# Altium PCB Motor_Driver_Model_D201.PcbDoc (part 1 of 2)
Units mil, origin at the board's own origin, x right, y up, seen from the top; angles counter-clockwise.
Board outline 1181.1 x 787.4 mil, 4 copper layers (1-SIG-TOP, 2-GND, 3-GND-PWR, 4-SIG-BOT), stack 37.795 mil thick; 50 components, 25 nets, 114 pads, 118 vias.
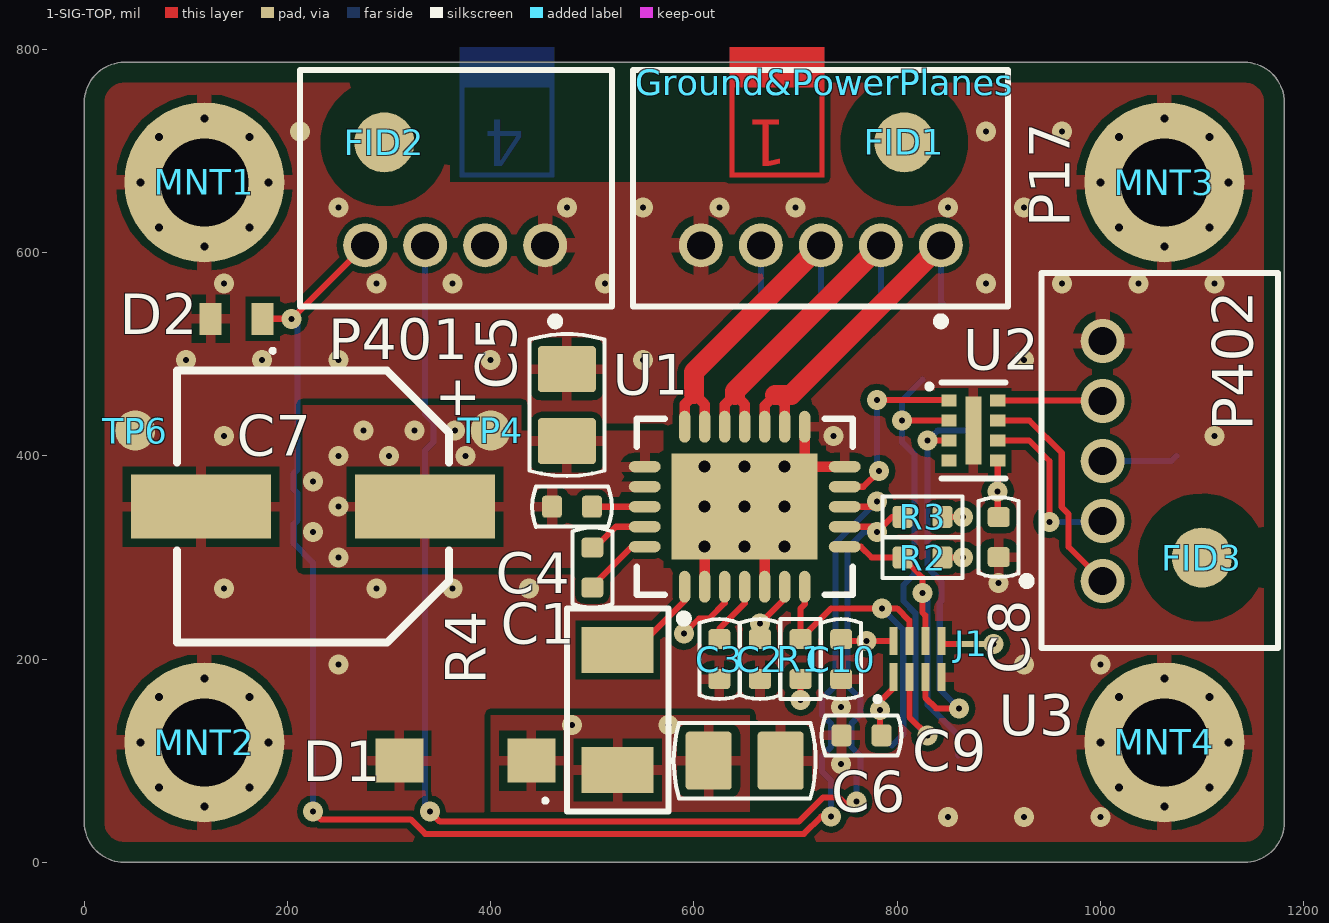
[diagram p0: 1-SIG-TOP view]
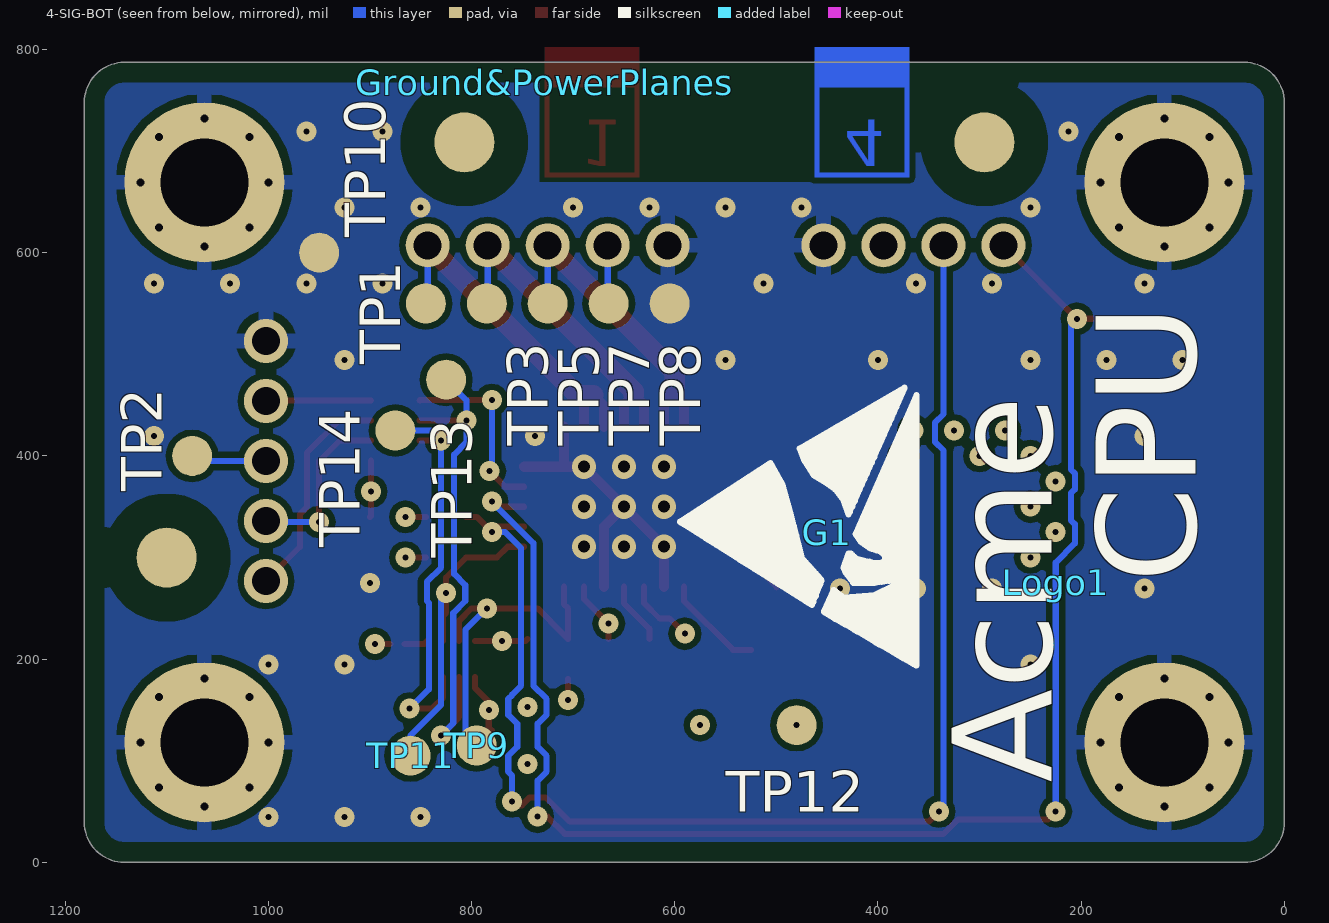
[diagram p1: 4-SIG-BOT view, seen from below]
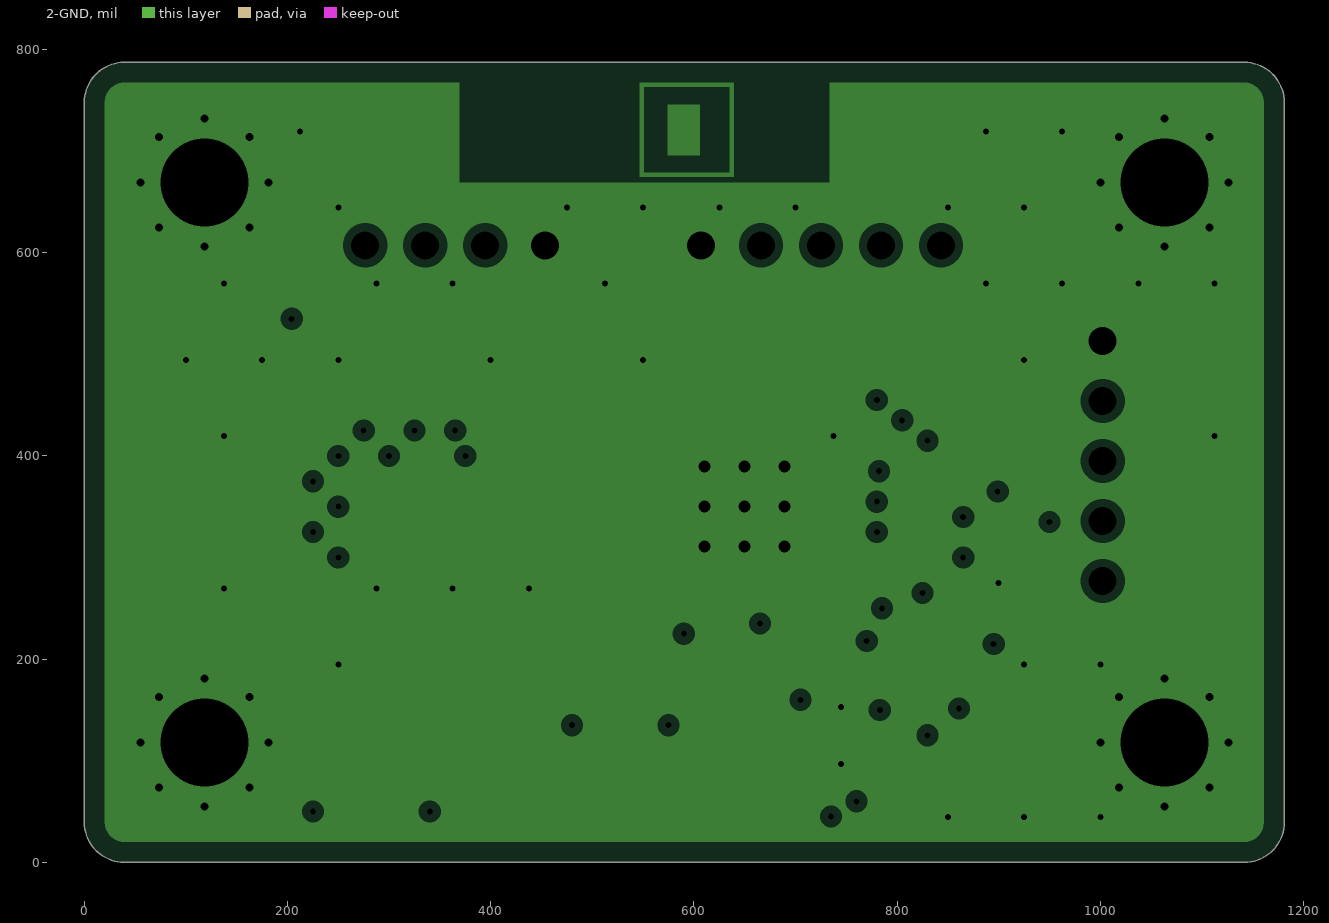
[diagram p2: 2-GND, clearances drawn from the general rule]
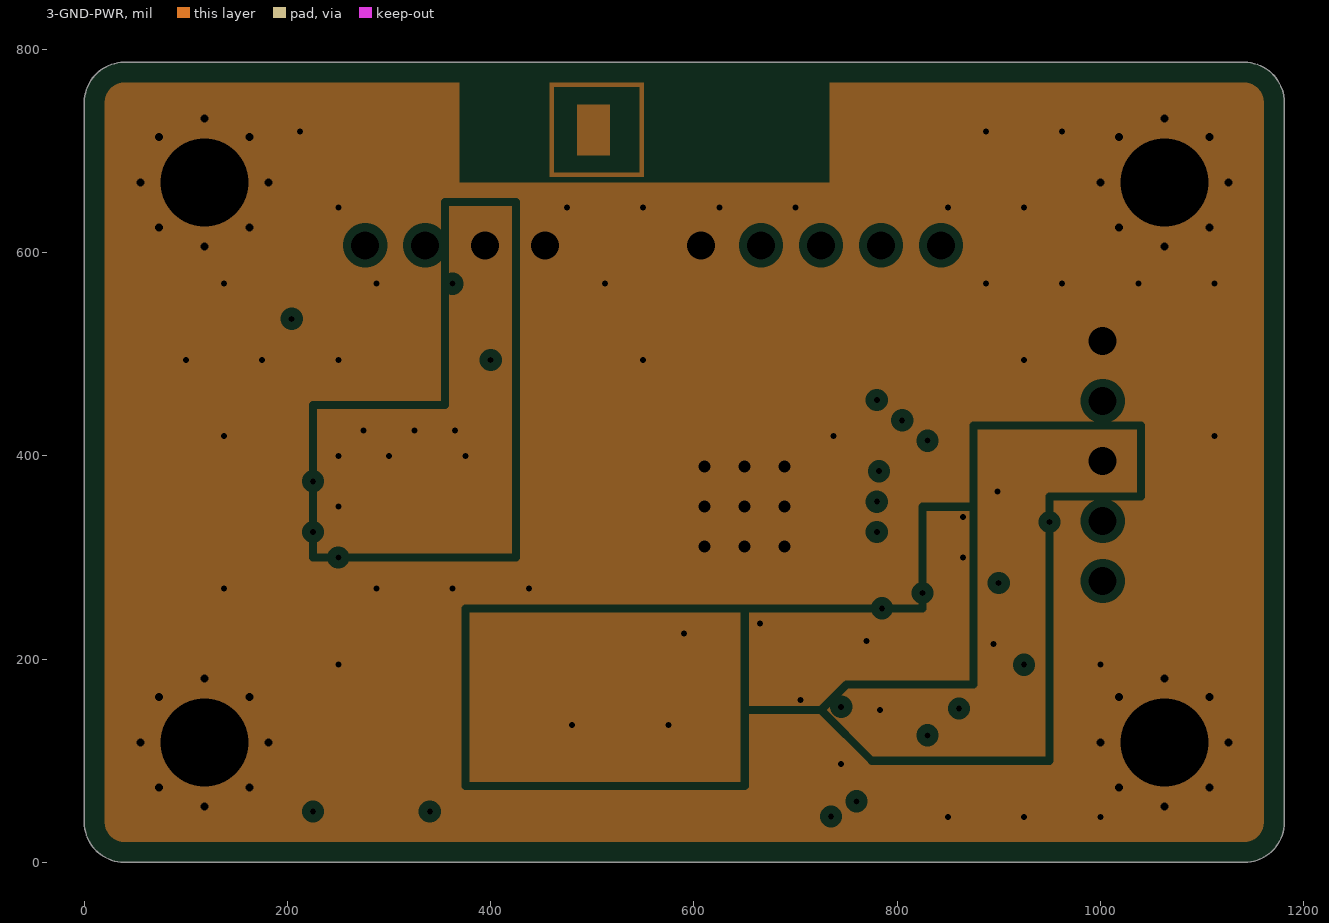
[diagram p3: 3-GND-PWR, clearances drawn from the general rule]
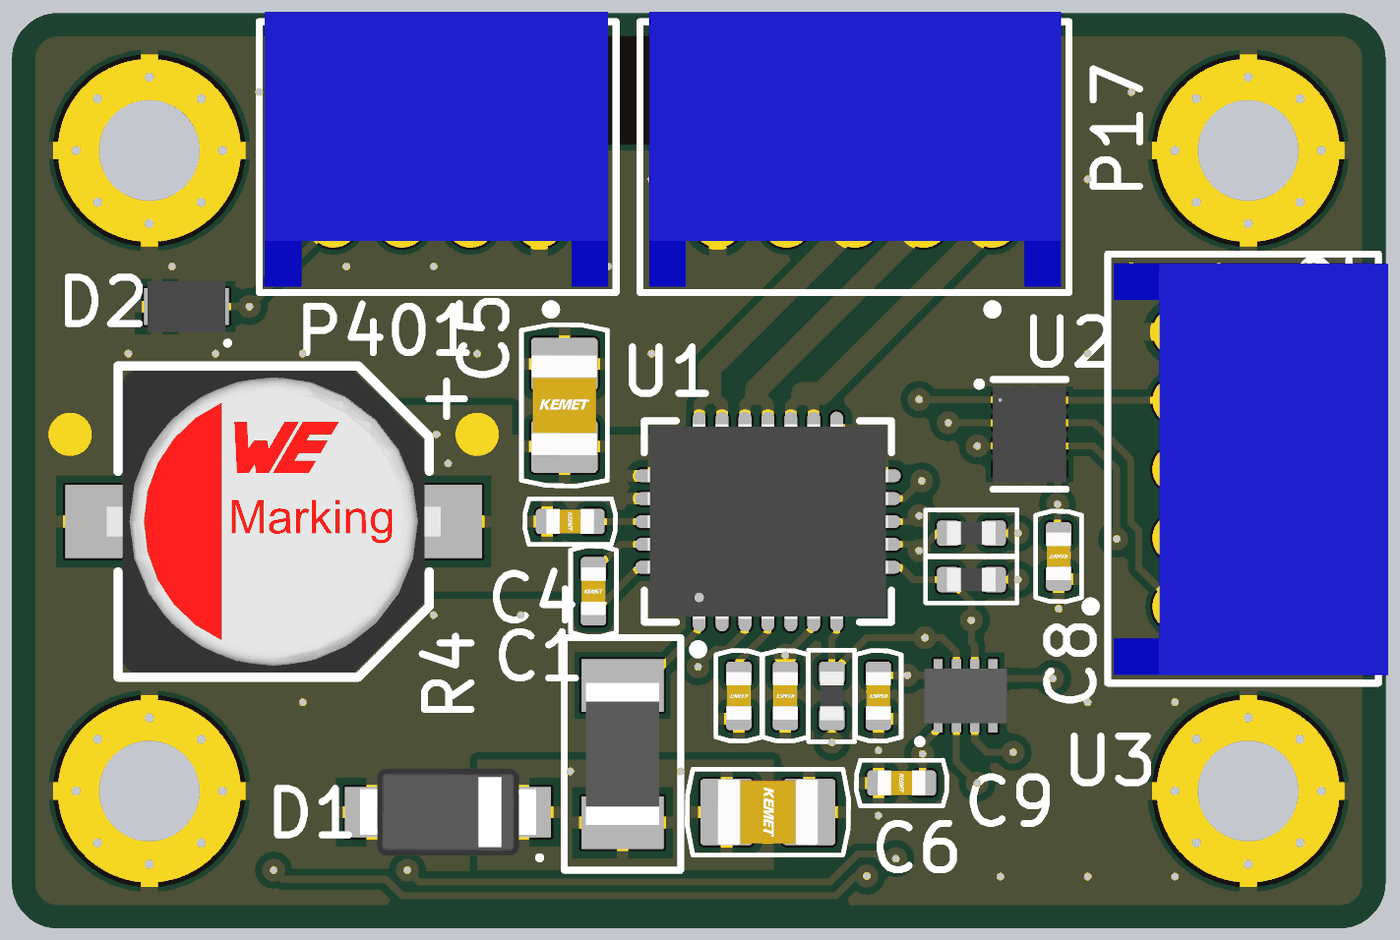
[diagram p4: 3D render of the assembled board from above, using the file's embedded part models]

## Layer stack, top to bottom
Top Solder: solder mask 0.3937, Solder Resist, Dk 3.5
1-SIG-TOP: signal copper 1.378
Dielectric 1: prepreg 4.3307, FR-4, Dk 4.29
2-GND: plane copper 1.378, net GND
Dielectric 3: core 23.622, Dk 4.2
3-GND-PWR: plane copper 1.378, net GND
Dielectric 2: prepreg 4.3307, Dk 4.29
4-SIG-BOT: signal copper 1.378
Bottom Solder: solder mask 0.3937, Solder Resist, Dk 3.5

## Board outline
39.37,0 cw(c39.37,39.37) 0,39.37 0,748.03 cw(c39.37,748.03) 39.37,787.4 1141.73,787.4 cw(c1141.73,748.03) 1181.1,748.03 1181.1,39.37 cw(c1141.73,39.37) 1141.73,0

## Design rules (kind name [scope] priority, off if disabled: settings)
BoardOutlineClearance BoardOutlineClearance_LayerStack [WithinRoom('PCB_Stackup')] p1: gap=0 ignorepadtopadclearanceinfootprint=FALSE
BoardOutlineClearance BoardOutlineClearance_LayerNames [WithinRoom('Layer_Names')] p2: gap=0 ignorepadtopadclearanceinfootprint=FALSE
BoardOutlineClearance BoardOutlineClearance_Overlays [OnBottomSilkscreen or OnTopSilkscreen] p3: gap=0 ignorepadtopadclearanceinfootprint=FALSE
BoardOutlineClearance [All] p4: gap=19.68 ignorepadtopadclearanceinfootprint=FALSE
Clearance Clearance_InnerLayers [OnLayer('2-GND') or OnLayer('3-GND-PWR')] p1: gap=6 ignorepadtopadclearanceinfootprint=TRUE except(8: Arc-SMDPad Arc-THPad Arc-Via Arc-Hole Track-SMDPad Track-THPad Track-Via Track-Hole THPad-THPad THPad-Via THPad-Fill THPad-Poly THPad-Region THPad-Hole Via-Via Via-Fill Via-Poly Via-Region Via-Hole Fill-Hole Poly-Hole Region-Hole)
Clearance [All] p2: gap=6 ignorepadtopadclearanceinfootprint=FALSE
ComponentClearance ComponentClearance_NetTie [HasFootprint('Net Tie 6x30mil') vs not HasFootprint('Net Tie 6x30mil')] p1: gap=0 collisioncheckmode=3 verticalgap=0 showdistances=FALSE
ComponentClearance ComponentClearance_PCB_Stackup [WithinRoom('PCB_Stackup')] p2: gap=0 collisioncheckmode=3 verticalgap=0 showdistances=FALSE
ComponentClearance ComponentClearance_PCB_Features [InComponentClass('PCB_FEATURE')] p3: gap=0 collisioncheckmode=3 verticalgap=0 showdistances=FALSE
ComponentClearance ComponentClearance_Fiducials [InComponentClass('PCB_FEATURE') vs HasFootprint('CONN_S4B-ZR(LF)(SN)') or HasFootprint('CONN_S5B-ZR(LF)(SN)')] p4: gap=0 collisioncheckmode=3 verticalgap=0 showdistances=FALSE
ComponentClearance ComponentClearance_Top [OnTopLayer vs OnTopLayer] p5: gap=12 collisioncheckmode=3 verticalgap=40 showdistances=FALSE
ComponentClearance ComponentClearance_Bot [OnBottomLayer vs OnBottomLayer] p6: gap=12 collisioncheckmode=3 verticalgap=40 showdistances=FALSE
DiffPairsRouting [All] p1: maxlimit=6 minlimit=5 mostfreqgap=6 toplayer_minwidth=5 toplayer_maxwidth=6 toplayer_prefwidth=6 bottomlayer_minwidth=5 bottomlayer_maxwidth=6 bottomlayer_prefwidth=6 maxuncoupledlength=500
HoleToHoleClearance [All] p1: gap=10 allowstackedmicrovias=FALSE
MinimumAnnularRing MinimumAnnularRing_Via_Int [IsVia and not (OnTopLayer or OnBottomLayer)] p1: minimumring=0
MinimumAnnularRing [All] p2: minimumring=6
MinimumSolderMaskSliver [All] p1: minsoldermaskwidth=3
PlaneClearance [All] p1: clearance=8
PlaneConnect PlaneConnect_Via [IsVia] p1: planeconnectstyle=Direct reliefexpansion=20 reliefentries=4 reliefconductorwidth=10 reliefairgap=10
PlaneConnect PlaneConnect_HeatTrap [All] p2: pad.planeconnectstyle=Relief pad.reliefexpansion=6 pad.reliefentries=4 pad.reliefconductorwidth=6 pad.reliefairgap=6 via.planeconnectstyle=Direct via.reliefexpansion=8 via.reliefentries=4 via.reliefconductorwidth=10 via.reliefairgap=10
PolygonConnect PolygonConnect_Via [IsVia] p1: connectstyle=Direct reliefconductorwidth=10 reliefentries=4 polygonreliefangle="90 Angle" airgapwidth=10
PolygonConnect PolygonConnect_TestPoints [InComponentClass('TestPoint')] p2: connectstyle=Direct reliefconductorwidth=10 reliefentries=4 polygonreliefangle="90 Angle" airgapwidth=10
PolygonConnect PolygonConnect_ThermPads [HasFootprintPad('DFN65P100X40-4N','5') or HasFootprintPad('WSON-6 065','7') or HasFootprintPad('SOT908-1','9')] p3: connectstyle=Direct reliefconductorwidth=10 reliefentries=4 polygonreliefangle="90 Angle" airgapwidth=10
PolygonConnect [All] p4: thpad.connectstyle=Relief thpad.reliefconductorwidth=15 thpad.reliefentries=4 thpad.polygonreliefangle="90 Angle" thpad.airgapwidth=8 smdpad.connectstyle=Relief smdpad.reliefconductorwidth=10 smdpad.reliefentries=4 smdpad.polygonreliefangle="90 Angle" smdpad.airgapwidth=8 via.connectstyle=Direct via.reliefconductorwidth=10 via.reliefentries=4 via.polygonreliefangle="90 Angle" via.airgapwidth=10
RoomDefinition BLDC_DRV [InComponentClass('BLDC_DRV')] p1: confinementstyle=ConfineIn formatcopy=TRUE lockcomponents=FALSE outline 875,50 875,525 425,525 425,50
RoomDefinition Layer_Names [False] p2: confinementstyle=ConfineIn formatcopy=TRUE lockcomponents=FALSE outline 3641.73,1968.5 4429.13,1968.5 4429.13,1535.43 3641.73,1535.43
RoomDefinition PCB_Stackup [False] p3: confinementstyle=ConfineIn formatcopy=TRUE lockcomponents=FALSE outline 353.47,810 353.47,665 740,665 740,810
RoutingVias [All] p1: holewidth=5.91 width=19.68 viastyle="Through Hole" minholewidth=5.91 minwidth=19.68 maxholewidth=19.68 maxwidth=27.56
SilkToSilkClearance [All] p1: silktosilkclearance=1
SilkToSolderMaskClearance [IsPad] p1: minsilkscreentomaskgap=4 clearancetoexposedcopper=FALSE
SolderMaskExpansion [All] p1: expansion=2 istentingtop=FALSE
Width [All] p1: maxlimit=200 minlimit=6 preferedwidth=10
22 further rules are at their usual default settings.

## Classes and differential pairs
component class TP: TP1 TP2 TP3 TP4 TP5 TP6 TP7 TP8 TP9 TP10 TP11 TP12 TP13 TP14
component class BLDC_DRV: C1 C2 C3 C4 C5 C6 D1 J1 R1 R2 R3 R4 R5 U1
component class PCB_FEATURE: FID1 FID2 FID3 G1 Logo1
component class "Net Tie": J1
component class TestPoint: TP1 TP2 TP3 TP4 TP5 TP6 TP7 TP8 TP9 TP10 TP11 TP12 TP13 TP14

## Components (designator, comment, footprint, x,y, rotation, side; value= is the part's Value field where it differs from the comment)
C1 "CAP CER 0.1UF 50V X7R 0402" C0402 500,290 r270 top
C2 "CAP CER 1UF 6.3V X5R 0402" C0402 665,200 r90 top
C3 "CAP CER 1UF 6.3V X5R 0402" C0402 625,200 r90 top
C4 "CAP CER 0.1UF 50V X7R 0402" C0402 480,350 r180 top
C5 "CAP CER 22UF 25V X5R 0805" C0805 475,450 r90 top
C6 "CAP CER 10uF X7R 10% 0805" C0805 650,100 r0 top
C7 "CAP ALUM 68 UF 20% 25 V SMD" WCAP-ASLI_6.3X5.5 225,350 r180 top (schematic designator C1)
C8 "CAP CER 1UF 6.3V X5R 0402" C0402 900,320 r90 top (schematic designator C2)
C9 "CGA2B3X7R1H104K050BB" C0402 765,125 r180 top (schematic designator C1)
C10 "CGA2B3X7R1H104K050BB" C0402 745,200 r90 top (schematic designator C2)
D1 "Zener Diode 6.2V 2.5W ±5% Surface Mount SOD-123FL" SOD-123FL 375,100 r180 top
D2 "ESDA7P120-1U1M" ST_QFN_1610 150,535 r180 top (schematic designator D1)
FID1 "N/A" FIDUCIAL 807.09,708.66 r0 top
FID2 "N/A" FIDUCIAL 295.28,708.66 r90 top
FID3 "N/A" FIDUCIAL 1100,300 r90 top
G1 "Logo_ESD" LOGO_ESD 450,325 r90 bottom
Ground&PowerPlanes "Number & Stacking Stripe" PLANE-2 728.35,767.72 r180 top
Ground&PowerPlanes "Number & Stacking Stripe" PLANE-3 728.35,767.72 r180 top
Ground&PowerPlanes "Number & Stacking Stripe" SIGNAL-1 728.35,767.72 r180 top
Ground&PowerPlanes "Number & Stacking Stripe" SIGNAL-4 728.35,767.72 r180 bottom
J1 "Net Tie" "Net Tie 6x30mil" 873,215 r180 top net-tie
Logo1 "Logo ACME_CPU" LOGO_ACME_CPU 225,275 r90 bottom (schematic designator Logo)
MNT1 "MountHole M2. Nothing to buy or mount" MOUNTHOLE_M2 118.11,669.29 r0 top locked
MNT2 "MountHole M2. Nothing to buy or mount" MOUNTHOLE_M2 118.11,118.11 r0 top locked
MNT3 "MountHole M2. Nothing to buy or mount" MOUNTHOLE_M2 1062.99,669.29 r0 top locked
MNT4 "MountHole M2. Nothing to buy or mount" MOUNTHOLE_M2 1062.99,118.11 r0 top locked
P17 "BLDC Motor" CONN_S5B-ZR(LF)(SN) 725,690 r180 top locked
P401 "PWR_IN" CONN_S4B-ZR(LF)(SN) 365,690 r180 top locked
P402 "I2C" CONN_S5B-ZR(LF)(SN) 1085,395 r90 top locked
R1 "DNP*" R0402 705,200 r270 top (schematic designator R2)
R2 "DNP*" R0402 825,300 r0 top (schematic designator R3)
R3 "RES SMD 4.75K OHM 1% 1/16W 0402" R0402 825,340 r180 top (schematic designator R4)
R4 "RES SMD 39 OHM 1% 1/4W 1206" R1206 525,150 r270 top (schematic designator R5)
TP1 "Test Point Pad" TESTPOINT 845,550 r90 bottom
TP2 "Test Point Pad" TESTPOINT 1075,400 r90 bottom
TP3 "Test Point Pad" TESTPOINT 785,550 r90 bottom
TP4 "Test Point Pad" TESTPOINT 400,425 r90 top
TP5 "Test Point Pad" TESTPOINT 725,550 r90 bottom
TP6 "Test Point Pad" TESTPOINT 50,425 r90 top
TP7 "Test Point Pad" TESTPOINT 665,550 r90 bottom
TP8 "Test Point Pad" TESTPOINT 605,550 r90 bottom
TP9 "Test Point Pad" TESTPOINT 795,115 r90 bottom (schematic designator TP13)
TP10 "Test Point Pad" TESTPOINT 950,600 r90 bottom
TP11 "Test Point Pad" TESTPOINT 860,105 r90 bottom (schematic designator TP14)
TP12 "Test Point Pad" TESTPOINT 480,135 r90 bottom (schematic designator TP17)
TP13 "Test Point Pad" TESTPOINT 825,475 r90 bottom (schematic designator TP18)
TP14 "Test Point Pad" TESTPOINT 875,425 r90 bottom (schematic designator TP19)
U1 "DRV10975ZRHFR" RHF24_2P65X3P65 650,350 r90 top
U2 "TPD3F303DPVR" DPV8_1P7X0P4 875,425 r0 top (schematic designator U1)
U3 "TXS0102DQMR" DQM8 820,200 r90 top (schematic designator U1)

## Footprints (in the part's own frame and the unit in brackets; to place one, negate y for a bottom-side part, rotate by r counter-clockwise, add the part's x,y. Pads: shape width x height; smd on the part's side, far side on the other; paste and mask are expansions set on the pad)
C0402 [mm]
  rrect35% 0.5x0.55 smd: 1(-0.5,0) 2(0.5,0)
  silkscreen extent -1,-0.5 1,0.5, body extent -0.52,-0.28 0.52,0.28, height 0.55
C0805 [mm]
  rrect15% 1.15x1.45 smd: 1(-0.9,0) 2(0.9,0)
  silkscreen extent -1.78,-0.94 1.77,0.94, body extent -1.1,-0.73 1.1,0.72, height 0.88
CONN_S4B-ZR(LF)(SN) [mm] "CONN HEADER R/A 4POS 1.5MM"
  round 1.1 hole 0.7: 1(-2.25,2.1) 2(-0.75,2.1) 3(0.75,2.1) 4(2.25,2.1)
  silkscreen extent -3.92,-2.29 3.87,4.1, body extent -3.75,-2.5 3.75,3.5, height 3.8
CONN_S5B-ZR(LF)(SN) [mm] "CONN HEADER R/A 5POS 1.5MM"
  round 1.1 hole 0.7: 1(-3,2.1) 2(-1.5,2.1) 3(0,2.1) 4(1.5,2.1) 5(3,2.1)
  silkscreen extent -4.67,-2.29 4.7,4.1, body extent -4.5,-2.5 4.5,3.5, height 3.8
DPV8_1P7X0P4 [mm]
  rect 0.38x0.3 smd paste+0 mask+0.05: 1(-0.61,0.75) 2(-0.61,0.25) 3(-0.61,-0.25) 4(-0.61,-0.75) 5(0.61,-0.75) 6(0.61,-0.25) 7(0.61,0.25) 8(0.61,0.75)
  rect 0.4x1.7 smd paste-0.837 mask+0.05: 9(0,0)
  silkscreen extent -1.15,-1.2 0.8,1.2, body extent -0.8,-1.05 0.8,1.05, height 0.65
DQM8 [mm]
  rect 0.7x0.2 smd mask+0.05: 1(-0.45,0.6) 2(-0.45,0.2) 3(-0.45,-0.2) 4(-0.45,-0.6) 5(0.45,-0.6) 6(0.45,-0.2) 7(0.45,0.2) 8(0.45,0.6)
  silkscreen extent -1.05,0.95 -0.95,1.05, body extent -0.6,-0.9 0.6,0.9, height 0.5
FIDUCIAL [mm]
  round 1.5 smd paste+0 mask+0.75: ""(0,0)
  round 1.5 smd far side paste+0 mask+0.75: ""(0,0)
  1-SIG-TOP pour cut-out: 0,1.6 0.158,1.6 0.467,1.538 0.758,1.418 1.02,1.243 1.243,1.02 1.418,0.758 1.538,0.467 1.6,0.158 1.6,0 1.6,0 1.6,-0.158 1.538,-0.467 1.418,-0.758 1.243,-1.02 1.02,-1.243 0.758,-1.418 0.467,-1.539 0.158,-1.6 0,-1.6 -0.158,-1.6 -0.467,-1.538 -0.758,-1.418 -1.02,-1.243 -1.243,-1.02 -1.418,-0.758 -1.538,-0.467 -1.6,-0.158 -1.6,0 -1.6,0.158 -1.538,0.467 -1.418,0.758 -1.243,1.02 -1.02,1.243 -0.758,1.418 -0.467,1.538 -0.158,1.6 0,1.6
  4-SIG-BOT pour cut-out: 0,1.6 0.158,1.6 0.467,1.538 0.758,1.418 1.02,1.243 1.243,1.02 1.418,0.758 1.538,0.467 1.6,0.158 1.6,0 1.6,-0.158 1.538,-0.467 1.418,-0.758 1.243,-1.02 1.02,-1.243 0.758,-1.418 0.467,-1.539 0.158,-1.6 0,-1.6 -0.158,-1.6 -0.467,-1.538 -0.758,-1.418 -1.02,-1.243 -1.243,-1.02 -1.418,-0.758 -1.538,-0.467 -1.6,-0.158 -1.6,0 -1.6,0.158 -1.538,0.467 -1.418,0.758 -1.243,1.02 -1.02,1.243 -0.758,1.418 -0.467,1.538 -0.158,1.6 0,1.6
  body extent -1.49,-1.5 1.5,1.5
LOGO_ACME_CPU [mil]
LOGO_ESD [mil] "Silk only"
  silkscreen extent -131,-88 142,145
MOUNTHOLE_M2 [mm] "Mount Hole M2"
  round 4 hole 2.2 paste-2 mask-2: 1(0,0)
  body extent -2,-2 2,2
"Net Tie 6x30mil" [mil]
  rect 16x6 smd paste-5 mask-5: 1(-7,0) 2(7,0)
PLANE-2 [mil]
  2-GND region: 187.01,-4.92 187.01,0 83.66,0 83.66,-4.92
  2-GND region: 83.66,-4.92 88.58,-4.92 88.58,98.43 83.66,98.43
  2-GND region: 93.5,21.73 93.5,4.92 177.16,4.92 177.16,21.73
  2-GND region: 177.17,88.58 154.46,88.58 154.46,4.92 177.17,4.92
  2-GND region: 177.17,72.06 177.17,88.58 93.5,88.58 93.5,72.06
  2-GND region: 93.5,4.92 122.18,4.92 122.18,88.58 93.5,88.58
  2-GND region: 187.01,93.5 187.01,98.43 83.66,98.43 83.66,93.5
  2-GND region: 182.09,-4.92 358.86,-4.92 358.86,98.43 182.09,98.43
  2-GND region: 187.01,-4.92 187.01,0 83.66,0 83.66,-4.92
  2-GND region: 93.5,21.73 93.5,4.92 177.16,4.92 177.16,21.73
  2-GND region: 177.17,88.58 154.46,88.58 154.46,4.92 177.17,4.92
  2-GND region: 177.17,72.06 177.17,88.58 93.5,88.58 93.5,72.06
  2-GND region: 93.5,4.92 122.18,4.92 122.18,88.58 93.5,88.58
  2-GND region: -4.92,-4.92 88.58,-4.92 88.58,98.43 -4.92,98.43
PLANE-3 [mil]
  3-GND-PWR region: 172.24,-4.92 177.16,-4.92 177.16,98.43 172.24,98.43
  3-GND-PWR region: 83.66,-4.92 88.58,-4.92 88.58,98.43 83.66,98.43
  3-GND-PWR region: 275.59,93.5 275.59,98.42 172.24,98.42 172.24,93.5
  3-GND-PWR region: 182.09,4.92 210.85,4.92 210.85,88.58 182.09,88.58
  3-GND-PWR region: 265.75,72.06 265.75,88.58 182.09,88.58 182.09,72.06
  3-GND-PWR region: 265.75,88.58 243.65,88.58 243.65,4.92 265.75,4.92
  3-GND-PWR region: 182.09,21.73 182.09,4.92 265.75,4.92 265.75,21.73
  3-GND-PWR region: 275.59,-4.92 275.59,0 172.24,0 172.24,-4.92
  3-GND-PWR region: -4.92,-4.92 173.21,-4.92 173.21,98.43 -4.92,98.43
  3-GND-PWR region: 275.59,93.5 275.59,98.42 172.24,98.42 172.24,93.5
  3-GND-PWR region: 182.09,4.92 210.85,4.92 210.85,88.58 182.09,88.58
  3-GND-PWR region: 265.75,72.06 265.75,88.58 182.09,88.58 182.09,72.06
  3-GND-PWR region: 265.75,88.58 243.65,88.58 243.65,4.92 265.75,4.92
  3-GND-PWR region: 182.09,21.73 182.09,4.92 265.75,4.92 265.75,21.73
  3-GND-PWR region: 275.59,-4.92 275.59,0 172.24,0 172.24,-4.92
  3-GND-PWR region: 270.67,-4.92 358.86,-4.92 358.86,98.43 270.67,98.43
R0402 [mm]
  rrect35% 0.5x0.55 smd: 1(-0.5,0) 2(0.5,0)
  silkscreen extent -1,-0.51 1,0.5, body extent -0.53,-0.25 0.53,0.25, height 0.71
R1206 [mm]
  rect 1.15x1.8 smd: 1(-1.5,0) 2(1.5,0)
  silkscreen extent -2.54,-1.27 2.54,1.27, body extent -1.55,-0.8 1.55,0.8, height 0.65
RHF24_2P65X3P65 [mm] "Plastic Quad Flatpack No-Lead"
  rrect100% 0.8x0.28 smd mask+0.05: 1(-2,1.5) 2(-2,1) 3(-2,0.5) 4(-2,0) 5(-2,-0.5) 6(-2,-1) 7(-2,-1.5) 13(2,-1.5) 14(2,-1) 15(2,-0.5) 16(2,0) 17(2,0.5) 18(2,1) 19(2,1.5)
  rrect100% 0.28x0.8 smd mask+0.05: 8(-1,-2.5) 9(-0.5,-2.5) 10(0,-2.5) 11(0.5,-2.5) 12(1,-2.5) 20(1,2.5) 21(0.5,2.5) 22(0,2.5) 23(-0.5,2.5) 24(-1,2.5)
  rect 2.65x3.65 smd paste-2 mask+0: 25(0,0)
  silkscreen extent -2.89,-2.7 2.2,2.7, body extent -2.13,-2.63 2.13,2.63, height 1
SIGNAL-1 [mil]
  1-SIG-TOP region: 0,0 4.92,0 4.92,93.5 0,93.5
  1-SIG-TOP region: 93.5,88.58 93.5,93.5 0,93.5 0,88.58
  1-SIG-TOP region: 93.5,93.5 88.58,93.5 88.58,0 93.5,0
  1-SIG-TOP region: 0,4.92 0,-35 93.5,-35 93.5,4.92
  1-SIG-TOP region: 88.58,0 93.5,0 93.5,93.5 88.58,93.5
  1-SIG-TOP pour cut-out: -4.92,98.43 -4.92,-4.92 368.78,-4.92 368.78,98.42
SIGNAL-4 [mil]
  1-SIG-TOP region: 270.67,-93.5 265.75,-93.5 265.75,0 270.67,0
  1-SIG-TOP region: 265.75,-4.92 265.75,35 359.25,35 359.25,-4.92
  1-SIG-TOP region: 359.25,-93.5 354.33,-93.5 354.33,0 359.25,0
  1-SIG-TOP region: 359.25,-88.58 359.25,-93.5 265.75,-93.5 265.75,-88.58
  1-SIG-TOP region: 354.33,0 359.25,0 359.25,-93.5 354.33,-93.5
  1-SIG-TOP pour cut-out: -4.92,-98.43 -4.92,4.92 364.17,4.92 364.17,-98.43
SOD-123FL [mm]
  rect 1.2x1.1 smd: 1(-1.651,0) 2(1.651,0)
  silkscreen extent -2.05,0.95 -1.95,1.05, body extent -1.92,-0.95 1.93,0.95, height 1.35
ST_QFN_1610 [mm] "2-UDFN"
  rect 0.55x0.8 smd: 1(-0.65,0) 2(0.65,0)
  silkscreen extent -0.95,0.75 -0.85,0.85, body extent -0.85,-0.55 0.85,0.55, height 0.6
TESTPOINT [mm] "Test Point"
  round 1 smd paste-0.508 mask-0.025: 1(0,0)
  body extent -0.5,-0.5 0.5,0.5
WCAP-ASLI_6.3X5.5 [mm] "Aluminium Electrolytic V-Chip SMT Capacitors, 6.3x5.5mm"
  rect 3.5x1.6 smd: 1(-2.8,0) 2(2.8,0)
  silkscreen extent -3.4,-3.4 3.4,3.4, body extent -3.65,-3.3 3.65,3.3, height 5.5

## Part data
C1 C4: "0.1µF ±10% 50V Ceramic Capacitor X7R 0402 (1005 Metric)", Capacitance=100nF, Case/Package=0402, Case Code (Metric)=1005, Dielectric=X7R, Manufacturer=TDK, Manufacturer Part Number=CGA2B3X7R1H104K050BB, Max Operating Temperature=125°C, Min Operating Temperature=-55°C, Package Quantity=1, Ratings=AEC-Q200, Supplier Part Number 1=445-6899-1-ND, Tolerance=10%, Voltage=50V, Case Code (Imperial)=0402, ComponentLink1Description=http://product.tdk.com/capacitor/mlcc/en/documents/mlccspec_automotive_general_midvoltage_en.pdf?src-supplier=Future+Electronics, ComponentLink1URL=http://product.tdk.com/capacitor/mlcc/en/documents/mlccspec_automotive_general_midvoltage_en.pdf?src-supplier=Future+Electronics, ComponentLink2Description=http://www.farnell.com/datasheets/1807242.pdf?src-supplier=Element14, ComponentLink2URL=http://www.farnell.com/datasheets/1807242.pdf?src-supplier=Element14, ComponentLink3Description=http://www.mouser.com/ds/2/400/lcc_automotive_general_en-843974.pdf?src-supplier=Mouser, ComponentLink3URL=http://www.mouser.com/ds/2/400/lcc_automotive_general_en-843974.pdf?src-supplier=Mouser, ComponentLink4Description=http://www.farnell.com/datasheets/1936565.pdf?src-supplier=Element14, ComponentLink4URL=http://www.farnell.com/datasheets/1936565.pdf?src-supplier=Element14, ComponentLink5Description=http://www.farnell.com/datasheets/1735392.pdf?src-supplier=Element14, ComponentLink5URL=http://www.farnell.com/datasheets/1735392.pdf?src-supplier=Element14, Composition=Ceramic, Depth=0.5mm, Height=0.5mm, Lead Free="Lead Free", Length=1mm, Mount="Surface Mount", Packaging="Tape and Reel", Pricing 1="1=0.17, 10=0.118, 50=0.0668, 100=0.0553, 500=0.0388, 1000=0.0321, 2500=0.0299, 5000=0.0273 (USD)", REACH SVHC="No SVHC", Stock 1=2925303, Supplier 1=Digi-Key, Termination=SMD/SMT, Thickness=0.022inch, Voltage Rating=50V, Voltage Rating (DC)=50V, Weight=2.3E-05oz, Width=0.02inch
C2 C3 C8: "1µF ±10% 6.3V Ceramic Capacitor X5R 0402 (1005 Metric)", Capacitance=1uF, Case/Package=0402, Case Code (Metric)=1005, Dielectric=X5R, Dielectric Material=Ceramic, Manufacturer=Yageo, Manufacturer Part Number=CC0402KRX5R5BB105, Max Operating Temperature=85°C, Min Operating Temperature=-55°C, Package Quantity=1, Supplier Part Number 1=311-1438-1-ND, Tolerance=10%, Voltage Rating=6.3V, Case Code (Imperial)=0402, ComponentLink1Description=http://www.farnell.com/datasheets/70765.pdf?src-supplier=Farnell, ComponentLink1URL=http://www.farnell.com/datasheets/70765.pdf?src-supplier=Farnell, ComponentLink2Description=http://www.yageo.com/documents/recent/UPY-GPHC_X5R_4V-to-50V_25.pdf?src-supplier=Digi-Key, ComponentLink2URL=http://www.yageo.com/documents/recent/UPY-GPHC_X5R_4V-to-50V_25.pdf?src-supplier=Digi-Key, ComponentLink3Description=http://www.farnell.com/datasheets/2167237.pdf?src-supplier=Element14, ComponentLink3URL=http://www.farnell.com/datasheets/2167237.pdf?src-supplier=Element14, ComponentLink4Description=http://www.yageo.com/documents/recent/UPY-GPHC_X5R_4V-to-50V_12.pdf?src-supplier=Avnet+Europe, ComponentLink4URL=http://www.yageo.com/documents/recent/UPY-GPHC_X5R_4V-to-50V_12.pdf?src-supplier=Avnet+Europe, ComponentLink5Description=http://www.farnell.com/datasheets/1359354.pdf?src-supplier=Element14, ComponentLink5URL=http://www.farnell.com/datasheets/1359354.pdf?src-supplier=Element14, ComponentLink6Description=http://www.farnell.com/datasheets/70765.pdf?src-supplier=Element14, ComponentLink6URL=http://www.farnell.com/datasheets/70765.pdf?src-supplier=Element14, ComponentLink7Description=http://www.yageo.com/documents/recent/UPY-GPHC_X5R_4V-to-50V_12.pdf?src-supplier=Avnet, ComponentLink7URL=http://www.yageo.com/documents/recent/UPY-GPHC_X5R_4V-to-50V_12.pdf?src-supplier=Avnet, Composition=Ceramic, Depth=0.5mm, Halogen Free="Halogen Free", Height=0.5mm, Lead Free="Lead Free", Length=1mm, Mount="Surface Mount", Number of Pins=2, Packaging="Tape and Reel", Pricing 1="1=0.1, 10=0.05, 50=0.0272, 100=0.0222, 500=0.0158, 1000=0.0124, 2500=0.0113, 5000=0.0104 (USD)", Radiation Hardening=No, REACH SVHC="No SVHC", Stock 1=34926286, Supplier 1=Digi-Key, Termination=SMD/SMT, Thickness=0.022inch, Voltage Rating (DC)=6.3V, Width=0.02inch
C5: "22µF ±20% 25V Ceramic Capacitor X5R 0805 (2012 Metric)", Capacitance=22uF, Case/Package=0805, Case Code (Metric)=2012, Dielectric=X5R, Manufacturer=Yageo, Manufacturer Part Number=CC0805MKX5R8BB226, Max Operating Temperature=85°C, Min Operating Temperature=-55°C, Package Quantity=3000, Supplier Part Number 1=311-1903-1-ND, Tolerance=20%, Voltage Rating=25V, Case Code (Imperial)=0805, ComponentLink1Description=http://www.yageo.com/documents/recent/UPY-GPHC_X5R_4V-to-50V_25.pdf?src-supplier=Digi-Key, ComponentLink1URL=http://www.yageo.com/documents/recent/UPY-GPHC_X5R_4V-to-50V_25.pdf?src-supplier=Digi-Key, ComponentLink2Description=http://www.mouser.com/ds/2/447/Yageo_UPY-GP_NP0_16V-to-50V_9-358835.pdf?src-supplier=Mouser, ComponentLink2URL=http://www.mouser.com/ds/2/447/Yageo_UPY-GP_NP0_16V-to-50V_9-358835.pdf?src-supplier=Mouser, Halogen Free="Halogen Free", Height=1.25mm, Lead Free="Lead Free", Length=0.079inch, Mount="Surface Mount", Packaging="Tape and Reel", Pricing 1="1=0.5, 10=0.353, 50=0.267, 100=0.2325, 500=0.1722, 1000=0.1464 (USD)", Stock 1=1060, Supplier 1=Digi-Key, Termination=SMD/SMT, Thickness=0.057inch, Voltage Rating (DC)=25V, Weight=0.000194oz, Width=0.049inch
C6: "Capacitor,10uF,10V,X7R,10%,0805,Murata", Capacitance=10uF, Case/Package=0805, Case Code (Metric)=2012, Dielectric=X7R, Manufacturer=Murata, Manufacturer Part Number=GRM21BR71A106KA73L, Max Operating Temperature=125°C, Min Operating Temperature=-55°C, Package Quantity=3000, Supplier Part Number 1=490-10516-1-ND, Tolerance=10%, Voltage Rating=10V, Case Code (Imperial)=0805, ComponentLink1Description=http://components.arrow.com/part/dataview/0323_07281730?src-supplier=Arrow+Europe, ComponentLink1URL=http://components.arrow.com/part/dataview/0323_07281730?src-supplier=Arrow+Europe, ComponentLink2Description=http://www.mouser.com/ds/2/281/c02e-2905.pdf?src-supplier=Mouser, ComponentLink2URL=http://www.mouser.com/ds/2/281/c02e-2905.pdf?src-supplier=Mouser, ComponentLink3Description=http://www.farnell.com/datasheets/2079188.pdf?src-supplier=Newark, ComponentLink3URL=http://www.farnell.com/datasheets/2079188.pdf?src-supplier=Newark, ComponentLink4Description=http://www.farnell.com/datasheets/2079188.pdf?src-supplier=Farnell, ComponentLink4URL=http://www.farnell.com/datasheets/2079188.pdf?src-supplier=Farnell, ComponentLink5Description=http://www.farnell.com/datasheets/2079188.pdf?src-supplier=Element14, ComponentLink5URL=http://www.farnell.com/datasheets/2079188.pdf?src-supplier=Element14, ComponentLink6Description=http://search.murata.co.jp/Ceramy/image/img/A01X/G101/ENG/GRM21BR71A106KA73-01.pdf?src-supplier=Digi-Key, ComponentLink6URL=http://search.murata.co.jp/Ceramy/image/img/A01X/G101/ENG/GRM21BR71A106KA73-01.pdf?src-supplier=Digi-Key, Depth=1.25mm, Height=1.25mm, Length=2mm, Mount="Surface Mount", Packaging="Tape and Reel", Pricing 1="1=0.26, 10=0.176, 100=0.089, 500=0.0609, 1000=0.0538 (USD)", REACH SVHC="No SVHC", Stock 1=2099435, Supplier 1=Digi-Key, Termination=SMD/SMT, Thickness=0.055inch, Voltage Rating (DC)=10V, Weight=0.000335oz, Width=1.25mm
C7: "WCAP-ASLI Aluminum Electrolytic Capacitor, V-Chip, SMT, D6.3xH5.5mm, 68uF, 25V", Capacitance=68uF, Capacitance Tolerance=+/-20%, Case/Package=Radial, Leakage Current=17uA, Manufacturer="Wurth Elektronik", Manufacturer Part Number=865080443009, Max Operating Temperature=105°C, Min Operating Temperature=-55°C, Operating Temperature="-55 to +105degC", Package Quantity=1000, Rated Voltage=25VDC, Ripple Current=240mA, Supplier Part Number 1=732-8437-1-ND, Tolerance=20%, Voltage Rating=25V, ComponentLink1Description=Manufacturer, ComponentLink1URL=http://www.we-online.de, ComponentLink2Description=Datasheet, ComponentLink2URL=https://www.we-online.com/catalog/datasheet/865080443009.pdf, ComponentLink3Description=http://www.farnell.com/datasheets/1880144.pdf?src-supplier=Farnell, ComponentLink3URL=http://www.farnell.com/datasheets/1880144.pdf?src-supplier=Farnell, ComponentLink4Description=http://katalog.we-online.de/pbs/datasheet/865080443009.pdf?src-supplier=Digi-Key, ComponentLink4URL=http://katalog.we-online.de/pbs/datasheet/865080443009.pdf?src-supplier=Digi-Key, ComponentLink5Description=https://katalog.we-online.de/pbs/datasheet/865080443009.pdf?src-supplier=Digi-Key, ComponentLink5URL=https://katalog.we-online.de/pbs/datasheet/865080443009.pdf?src-supplier=Digi-Key, ComponentLink6Description=http://www.farnell.com/datasheets/1880144.pdf?src-supplier=Element14, ComponentLink6URL=http://www.farnell.com/datasheets/1880144.pdf?src-supplier=Element14, Diameter=6.3mm, Dissipation Factor=14%, Endurance=2000h, Height=5.5mm, Height - Seated (Max)=0.217inch, Impedance=480mR, Life (Hours)=2000Hour, Mount="Surface Mount", Mounting Technology=SMT, Packaging="Tape and Reel", Polarity=Polar, Pricing 1="1=0.26, 50=0.222, 100=0.194, 250=0.172, 500=0.151 (USD)", Published Date="May 2020", REACH SVHC=Unknown, Ripple Current (AC)=240mA, Stock 1=1129, Supplier 1=Digi-Key, Technical Reference=ASED055680M025DVCTBB000, Voltage Rating (DC)=25V
C9 C10: library part "CAP CER 0.1UF 50V X7R 0402", "0.1µF ±10% 50V Ceramic Capacitor X7R 0402 (1005 Metric)", Capacitance=100nF, Case/Package=0402, Case Code (Metric)=1005, Dielectric=X7R, Manufacturer=TDK, Max Operating Temperature=125°C, Min Operating Temperature=-55°C, Package Quantity=1, Ratings=AEC-Q200, Supplier Part Number 1=445-6899-1-ND, Tolerance=10%, Voltage=50V, Case Code (Imperial)=0402, ComponentLink1Description=http://product.tdk.com/capacitor/mlcc/en/documents/mlccspec_automotive_general_midvoltage_en.pdf?src-supplier=Future+Electronics, ComponentLink1URL=http://product.tdk.com/capacitor/mlcc/en/documents/mlccspec_automotive_general_midvoltage_en.pdf?src-supplier=Future+Electronics, ComponentLink2Description=http://www.farnell.com/datasheets/1807242.pdf?src-supplier=Element14, ComponentLink2URL=http://www.farnell.com/datasheets/1807242.pdf?src-supplier=Element14, ComponentLink3Description=http://www.mouser.com/ds/2/400/lcc_automotive_general_en-843974.pdf?src-supplier=Mouser, ComponentLink3URL=http://www.mouser.com/ds/2/400/lcc_automotive_general_en-843974.pdf?src-supplier=Mouser, ComponentLink4Description=http://www.farnell.com/datasheets/1936565.pdf?src-supplier=Element14, ComponentLink4URL=http://www.farnell.com/datasheets/1936565.pdf?src-supplier=Element14, ComponentLink5Description=http://www.farnell.com/datasheets/1735392.pdf?src-supplier=Element14, ComponentLink5URL=http://www.farnell.com/datasheets/1735392.pdf?src-supplier=Element14, Composition=Ceramic, Depth=0.5mm, Height=0.5mm, Lead Free="Lead Free", Length=1mm, Manufacturer Part Number=CGA2B3X7R1H104K050BB, Mount="Surface Mount", Packaging="Tape and Reel", Pricing 1="1=0.17, 10=0.118, 50=0.0668, 100=0.0553, 500=0.0388, 1000=0.0321, 2500=0.0299, 5000=0.0273 (USD)", REACH SVHC="No SVHC", Stock 1=2925303, Supplier 1=Digi-Key, Termination=SMD/SMT, Thickness=0.022inch, Voltage Rating=50V, Voltage Rating (DC)=50V, Weight=2.3E-05oz, Width=0.02inch
D1: library part "DIODE ZENER 6.2V 2.5W SOD123FL", Case/Package=SOD-123-2, Leakage Current=5uA, Manufacturer="ON Semiconductor", Manufacturer Part Number=1SMF5920BT1G, Max Operating Temperature=150°C, Max Power Dissipation=2.5W, Min Operating Temperature=-55°C, Package Quantity=3000, Supplier Part Number 1=1SMF5920BT1GOSCT-ND, Tolerance=5%, Working Voltage=4V, Zener Voltage=6.2V, ComponentLink1Description=http://www.mouser.com/ds/2/308/1SMF5920B-D-108688.pdf?src-supplier=Mouser, ComponentLink1URL=http://www.mouser.com/ds/2/308/1SMF5920B-D-108688.pdf?src-supplier=Mouser, ComponentLink2Description=http://components.arrow.com/part/dataview/50999384S92509N5236?src-supplier=Arrow, ComponentLink2URL=http://components.arrow.com/part/dataview/50999384S92509N5236?src-supplier=Arrow, ComponentLink3Description=http://www.onsemi.com/pub/Collateral/1SMF5920B-D.PDF?src-supplier=Digi-Key, ComponentLink3URL=http://www.onsemi.com/pub/Collateral/1SMF5920B-D.PDF?src-supplier=Digi-Key, ComponentLink4Description=http://www.onsemi.com/pub_link/Collateral/1SMF5920B-D.PDF?src-supplier=Avnet, ComponentLink4URL=http://www.onsemi.com/pub_link/Collateral/1SMF5920B-D.PDF?src-supplier=Avnet, Contact Plating=Tin,Matte, Depth=1.65mm, Direction=Unidirectional, Element Configuration=Single, Impedance=2R, Lead Free="Lead Free", Length=2.7mm, Max Reverse Leakage Current=5uA, Mount="Surface Mount", Number of Pins=2, Packaging="Tape and Reel", Power Dissipation=2.5W, Pricing 1="1=0.46, 10=0.391, 25=0.3652, 100=0.2712, 250=0.2576, 500=0.2117, 1000=0.1721 (USD)", Radiation Hardening=No, Stock 1=1919, Supplier 1=Digi-Key, Voltage Tolerance=5%
D2: library part "TVS DIODE ESDA7P120-1U1M 5.5V 11.5V 1610", "11.5V Clamp 120A (8/20µs) Ipp Tvs Diode Surface Mount 1610", Case/Package=0603, Case Code (Metric)=1610, Clamping Voltage=11.5V, Manufacturer=STMicroelectronics, Max Operating Temperature=150°C, Min Breakdown Voltage=6.4V, Min Operating Temperature=-55°C, Peak Pulse Current=120A, Peak Pulse Power=1.4kW, Power Line Protection=No, Reverse Standoff Voltage=5.5V, Supplier Part Number 1=497-17159-1-ND, Case Code (Imperial)=0603, ComponentLink1Description=http://www.st.com/content/ccc/resource/technical/document/datasheet/group3/5e/7c/5d/76/3f/de/45/35/DM00359316/files/DM00359316.pdf/jcr:content/translations/en.DM00359316.pdf?src-supplier=Digi-Key, ComponentLink1URL=http://www.st.com/content/ccc/resource/technical/document/datasheet/group3/5e/7c/5d/76/3f/de/45/35/DM00359316/files/DM00359316.pdf/jcr:content/translations/en.DM00359316.pdf?src-supplier=Digi-Key, ComponentLink2Description=http://www.farnell.com/datasheets/2815837.pdf?src-supplier=Newark, ComponentLink2URL=http://www.farnell.com/datasheets/2815837.pdf?src-supplier=Newark, ComponentLink3Description=http://www.farnell.com/datasheets/2815837.pdf?src-supplier=Farnell, ComponentLink3URL=http://www.farnell.com/datasheets/2815837.pdf?src-supplier=Farnell, ComponentLink4Description=http://www.farnell.com/datasheets/2815837.pdf?src-supplier=Element14, ComponentLink4URL=http://www.farnell.com/datasheets/2815837.pdf?src-supplier=Element14, Composition=Zener, Manufacturer Part Number=ESDA7P120-1U1M, Mount="Surface Mount", Number of Unidirectional Channels=1, Packaging="Cut Tape", Pricing 1="1=0.35, 10=0.287, 25=0.2624, 100=0.1647, 250=0.1629, 500=0.1525, 1000=0.1037, 2500=0.0994 (USD)", Stock 1=15775, Supplier 1=Digi-Key
FID1 FID2 FID3: library part Fiducial, "Fiducial mark.  There is nothing to buy or mount.", ClassName=PCB_FEATURE, CompType=Fiducial, Manufacturer=N/A, Manufacturer Part Number=N/A, MountType=N/A, PackageReference=Fiducial
J1: library part "Net Tie Line", ClassName="Net Tie"
MNT1 MNT2 MNT3 MNT4: library part MountHole_M2, "PCB Mount Hole. There is nothing to buy or mount."
P17 P402: library part "CONN HEADER TH R/A 5POS 1.5MM", "Connector Header Through Hole, Right Angle 5 position 0.059\" (1.50mm)", Color=Natural, Contact Resistance=30mR, Current Rating=1A, Housing Color=Beige, Manufacturer=JST, Manufacturer Part Number=S5B-ZR(LF)(SN), Max Operating Temperature=85°C, Max Voltage Rating (AC)=50V, Min Operating Temperature=-25°C, Supplier Part Number 1=455-1672-ND, ComponentLink1Description=http://www.jst-mfg.com/product/pdf/eng/eZH.pdf?src-supplier=Digi-Key, ComponentLink1URL=http://www.jst-mfg.com/product/pdf/eng/eZH.pdf?src-supplier=Digi-Key, ComponentLink2Description=https://www.verical.com/server-webapp/html/getDatasheet?partID=640593&src-supplier=Verical, ComponentLink2URL=https://www.verical.com/server-webapp/html/getDatasheet?partID=640593&src-supplier=Verical, ComponentLink3Description=http://www1.futureelectronics.com/doc/JST/S5B-ZR(LF)(SN).pdf?src-supplier=Future+Electronics, ComponentLink3URL=http://www1.futureelectronics.com/doc/JST/S5B-ZR(LF)(SN).pdf?src-supplier=Future+Electronics, ComponentLink4Description=http://www.produktinfo.conrad.com/datenblaetter/725000-749999/741204-da-01-en-STIFTLEISTE_GEWINKELT_5_POL_RM1_5.pdf?src-supplier=Conrad, ComponentLink4URL=http://www.produktinfo.conrad.com/datenblaetter/725000-749999/741204-da-01-en-STIFTLEISTE_GEWINKELT_5_POL_RM1_5.pdf?src-supplier=Conrad, Connector Type="Male Pin", Contact Material=Brass,Tin, Contact Mating Length=0.094inch, Contact Plating=Tin,Copper, Depth=6mm, Fastening Type=Detent, Gender=Male, Height=7.2mm, Housing Material=Polyamide, Lead Free="Lead Free", Length=9mm, Max Current Rating=1A, Mount="Through Hole", Number of Contacts=5, Number of Pins=5, Number of Positions=5, Number of Rows=1, Orientation="Right Angle", Packaging=Bulk, Pitch=1.5mm, Pricing 1="1=0.29, 10=0.272, 100=0.1889, 500=0.1598, 1000=0.1308, 5000=0.1162, 10000=0.1053 (USD)", Stock 1=41138, Supplier 1=Digi-Key, Termination=Press-Fit, Voltage Rating=50V, Width=3.5mm
  P17: pin_1=U, pin_2=V, pin_3=W, pin_4=NTC+, pin_5=NTC-
  P402: pin_1=SCL, pin_2=SDA, pin_3=+3V3, pin_4=DIR, pin_5=GND
P401: library part "CONN HEADER TH R/A 4POS 1.5MM", "Connector Header Through Hole, Right Angle 4 position 0.059\" (1.50mm)", Color=White, Contact Resistance=30mR, Current Rating=1A, Flammability Rating="UL94 V-0", Housing Color=Beige, Insulation Color=Natural, Insulation Resistance=500MR, Manufacturer=JST, Manufacturer Part Number=S4B-ZR(LF)(SN), Max Operating Temperature=85°C, Max Voltage Rating (AC)=50V, Min Operating Temperature=-25°C, Body Plating=Tin, ComponentLink1Description=https://www.verical.com/server-webapp/html/getDatasheet?partID=763273&src-supplier=Verical, ComponentLink1URL=https://www.verical.com/server-webapp/html/getDatasheet?partID=763273&src-supplier=Verical, ComponentLink2Description=https://www.verical.com/server-webapp/html/getDatasheet?partID=640380&src-supplier=Verical, ComponentLink2URL=https://www.verical.com/server-webapp/html/getDatasheet?partID=640380&src-supplier=Verical, ComponentLink3Description=http://www1.futureelectronics.com/doc/JST/S4B-ZR(LF)(SN).pdf?src-supplier=Future+Electronics, ComponentLink3URL=http://www1.futureelectronics.com/doc/JST/S4B-ZR(LF)(SN).pdf?src-supplier=Future+Electronics, ComponentLink4Description=http://www.jst-mfg.com/product/pdf/eng/eZH.pdf?src-supplier=Digi-Key, ComponentLink4URL=http://www.jst-mfg.com/product/pdf/eng/eZH.pdf?src-supplier=Digi-Key, ComponentLink5Description=http://www.farnell.com/datasheets/80556.pdf?src-supplier=Element14, ComponentLink5URL=http://www.farnell.com/datasheets/80556.pdf?src-supplier=Element14, ComponentLink6Description=https://www.verical.com/server-webapp/html/getDatasheet?partID=703398&src-supplier=Verical, ComponentLink6URL=https://www.verical.com/server-webapp/html/getDatasheet?partID=703398&src-supplier=Verical, Connector Type="Header,Male Pin", Contact Material=Brass,Tin,Copper, Contact Mating Length=0.094inch, Contact Plating=Tin,Copper, Contact Shape=Circular, Depth=6mm, Fastening Type=Detent, Gender=Male, Height=7.2mm, Housing Material=Polyamide, Insulation Material=Nylon, Lead Free="Lead Free", Lead Pitch=1.5mm, Length=7.5mm, Material=Nylon, Max Current Rating=1A, Max Voltage Rating (DC)=50V, Mount="Through Hole", Number of Contacts=4, Number of Pins=4, Number of Positions=4, Number of Rows=1, Orientation="Right Angle", Packaging=Bulk, Panel Thickness=3.5mm, pin_1=GND, pin_2=+VDC, pin_3=SENSE, pin_4=CTRL, Pitch=1.5mm, REACH SVHC="No SVHC", Stock 1=0, Supplier 1=Arrow, Supplier Part Number 1=S4B-ZR(LF)(SN), Termination=Solder, Voltage Rating=50V, Voltage Rating (AC)=50V, Voltage Rating (DC)=50V, Width=3.5mm
R1 R2: library part "RES SMD NO BOM 0402", "Placeholder for a 0402 resistor", Case/Package=0402
R3: "4.75 kOhms ±1% 0.063W, 1/16W Chip Resistor 0402 (1005 Metric) Moisture Resistant Thick Film", Case/Package=0402, Case Code (Metric)=1005, Manufacturer=Yageo, Manufacturer Part Number=RC0402FR-074K75P, Max Operating Temperature=155°C, Max Power Dissipation=63mW, Min Operating Temperature=-55°C, Resistance=4.75kR, Supplier Part Number 1=YAG1271CT-ND, Temperature Coefficient=150ppm/°C, Tolerance=1%, Case Code (Imperial)=0402, ComponentLink1Description=http://www.yageo.com/NewPortal/yageodocoutput?fileName=/pdf/R-Chip/PYu-RC_51_RoHS_P_0.pdf&src-supplier=Digi-Key, ComponentLink1URL=http://www.yageo.com/NewPortal/yageodocoutput?fileName=/pdf/R-Chip/PYu-RC_51_RoHS_P_0.pdf&src-supplier=Digi-Key, ComponentLink2Description=http://www.yageo.com.tw/exep/pages/download/literatures/PYu-R_INT-thick_7.pdf?src-supplier=Digi-Key, ComponentLink2URL=http://www.yageo.com.tw/exep/pages/download/literatures/PYu-R_INT-thick_7.pdf?src-supplier=Digi-Key, Composition="Thick Film", Features="Moisture Resistant", Height=0.016inch, Length=0.039inch, Mount="Surface Mount", Number of Terminations=2, Packaging="Tape and Reel", Pricing 1="1=0.1, 10=0.035, 100=0.014, 1000=0.0063, 2500=0.0055, 5000=0.0045 (USD)", Stock 1=23485, Supplier 1=Digi-Key, Width=0.02inch
R4: "39 Ohms ±5% 0.25W, 1/4W Chip Resistor 1206 (3216 Metric) Moisture Resistant Thick Film", Case/Package=1206, Case Code (Metric)=3216, Manufacturer=Yageo, Manufacturer Part Number=RC1206JR-0739RL, Max Operating Temperature=155°C, Min Operating Temperature=-55°C, Power Rating=250mW, Resistance=39R, Supplier Part Number 1=311-39ERCT-ND, Temperature Coefficient=100ppm/°C, Tolerance=5%, Voltage Rating=200V, Case Code (Imperial)=1206, ComponentLink1Description=http://www.yageo.com/documents/recent/PYu-RC1206_51_RoHS_L-4.pdf?src-supplier=Future+Electronics, ComponentLink1URL=http://www.yageo.com/documents/recent/PYu-RC1206_51_RoHS_L-4.pdf?src-supplier=Future+Electronics, ComponentLink2Description=http://www.farnell.com/datasheets/444357.pdf?src-supplier=Element14, ComponentLink2URL=http://www.farnell.com/datasheets/444357.pdf?src-supplier=Element14, ComponentLink3Description=https://produktinfo.conrad.com/datenblaetter/400000-424999/402370-da-01-en-SMD_Widerstand_Chip1206_39_Ohm.pdf?src-supplier=Conrad, ComponentLink3URL=https://produktinfo.conrad.com/datenblaetter/400000-424999/402370-da-01-en-SMD_Widerstand_Chip1206_39_Ohm.pdf?src-supplier=Conrad, Composition="Thick Film", Contact Plating=Tin,Matte, Depth=1.6mm, Height=0.55mm, Lead Free="Lead Free", Length=3.2mm, Military Standard=Not, Mount="Surface Mount", Number of Pins=2, Packaging="Tape and Reel", Pricing 1="1=0.1, 10=0.061, 100=0.0249, 1000=0.0112, 2500=0.0097 (USD)", Radiation Hardening=No, REACH SVHC=Unknown, Stock 1=98107, Supplier 1=Digi-Key, Termination=SMD/SMT, Voltage Rating (DC)=200V, Weight=0.000571oz, Width=1.6mm
TP1 TP2 TP3 TP4 TP5 TP6 TP7 TP8 TP9 TP10 TP11 TP12 TP13 TP14: "Test Point. There is nothing to buy or mount.", Manufacturer=N/A, ClassName=TestPoint, CompType=TestPoint, MountType=N/A, PackageReference=TetsPoint, PartNumber=N/A
U1: library part "IC DRV10975Z BLDC MOTOR DRIVER VQFN-24", "Multiphase Motor Driver Power MOSFET Analog, I²C, PWM 24-VQFN (5x4)", Manufacturer="Texas Instruments", Maximum Operating Temperature="+ 125 C", Minimum Operating Temperature="- 40 C", Operating Frequency="100 kHz", Operating Supply Current="5 mA", Operating Supply Voltage="6.5 V to 18 V", Operating Temperature Range="- 40 C to + 125 C", Output Current="1.5 A", Output Voltage="19 V", Package / Case=VQFN-24, Supplier Part Number 1=296-50214-1-ND, Brand="Texas Instruments", Category="Motor / Motion / Ignition Controllers & Drivers", Development Kit=DRV10975EVM, Features="Buck Step Down Converter, Initial Position Detect (IPD), Rotor Lock Protection, SPI/I2C, Integrated", Manufacturer Part Number=DRV10975ZRHFR, Minimum Order Quantity=1, Moisture Sensitive=Yes, Mount="Surface Mount", Number of Outputs="3 Output", Packaging="Cut Tape", Pricing 1="1=2.73, 10=2.31, 100=1.85, 250=1.62, 500=1.58, 1000=1.25, 3000=1.21, 6000=1.16, 9000=1.14 (USD)", Product="Brushless DC Motor Controllers", Product Type="Motor / Motion / Ignition Controllers & Drivers", Reeling=True, RoHS="RoHS Compliant", RoHS - Mouser=Y, Series=DRV10975, Standard Pack Qty=3000, Stock 1=2979, Subcategory="PMIC - Power Management ICs", Supplier 1=Digi-Key, Type="Half Bridge"
U2: library part "FILTER RC(PI) ESD SMD  8-UFDFN EP", "RC (Pi) EMI Filter 2nd Order Low Pass 3 Channel R = 47Ohms, 100Ohms, C = 20pF  8-UFDFN Exposed Pad", Capacitance=20pF, Case/Package=SMD/SMT, Clamping Voltage=10V, Frequency=308MHz, Manufacturer="Texas Instruments", Max Operating Temperature=85°C, Min Operating Temperature=-40°C, Operating Supply Voltage=5.5V, Package Quantity=1, Supplier Part Number 1=296-28299-1-ND, ComponentLink1Description=http://www.ti.com/lit/ds/symlink/tpd3f303.pdf?src-supplier=Digi-Key, ComponentLink1URL=http://www.ti.com/lit/ds/symlink/tpd3f303.pdf?src-supplier=Digi-Key, ComponentLink2Description=http://focus.ti.com/lit/ds/symlink/tpd3f303.pdf?src-supplier=Avnet+Europe, ComponentLink2URL=http://focus.ti.com/lit/ds/symlink/tpd3f303.pdf?src-supplier=Avnet+Europe, ComponentLink3Description=https://www.verical.com/server-webapp/html/getDatasheet?partID=302817&src-supplier=Verical, ComponentLink3URL=https://www.verical.com/server-webapp/html/getDatasheet?partID=302817&src-supplier=Verical, ComponentLink4Description=http://www.farnell.com/datasheets/1558442.pdf?src-supplier=Element14, ComponentLink4URL=http://www.farnell.com/datasheets/1558442.pdf?src-supplier=Element14, Contact Plating=Gold, Depth=1.7mm, ESD Protection=Yes, Height=0.026inch, Lead Free="Lead Free", Length=2.2mm, Manufacturer Part Number=TPD3F303DPVR, Mount="Surface Mount", Number of Channels=3, Number of Pins=8, Packaging="Tape and Reel", Pricing 1="1=0.85, 10=0.812, 25=0.7856, 50=0.6414, 100=0.576, 250=0.5236, 500=0.4974, 1000=0.4451 (USD)", Radiation Hardening=No, REACH SVHC="No SVHC", Stock 1=4896, Supplier 1=Digi-Key, Termination=Flat, Width=0.063inch
U3: library part "IC TXS0102 TRNSLTR BIDIRECTIONAL 8X2SON", "2-Bit Bidirectional Voltage-Level Translator for Open-Drain Application", High Level Output Current=-20uA, Low Level Output Current=1mA, Manufacturer="Texas Instruments", Max Operating Temperature=85°C, Max Supply Voltage=5.5V, Min Operating Temperature=-40°C, Min Supply Voltage=1.65V, Package Quantity=1, Quiescent Current=14.4uA, Supplier Part Number 1=296-28435-1-ND, ComponentLink1Description=https://www.verical.com/server-webapp/html/getDatasheet?partID=544149&src-supplier=Verical, ComponentLink1URL=https://www.verical.com/server-webapp/html/getDatasheet?partID=544149&src-supplier=Verical, ComponentLink2Description=http://www.ti.com/general/docs/suppproductinfo.tsp?distId=10&gotoUrl=http%3A%2F%2Fwww.ti.com%2Flit%2Fgpn%2Ftxs0102&src-supplier=Digi-Key, ComponentLink2URL=http://www.ti.com/general/docs/suppproductinfo.tsp?distId=10&gotoUrl=http%3A%2F%2Fwww.ti.com%2Flit%2Fgpn%2Ftxs0102&src-supplier=Digi-Key, Contact Plating=Gold, Data Rate=24Mbps, Height=0.35mm, Lead Free="Lead Free", Length=1.85mm, Logic Function=Translator, Manufacturer Part Number=TXS0102DQMR, Mount="Surface Mount", Number of Bits=2, Number of Channels=2, Number of Inputs=2, Number of Pins=8, Output Type=Voltage, Packaging="Tape and Reel", Pricing 1="1=0.69, 10=0.611, 25=0.5736, 100=0.4681, 250=0.4348, 500=0.37, 1000=0.296 (USD)", Propagation Delay=260ns, Radiation Hardening=No, REACH SVHC="No SVHC", Stock 1=53273, Supplier 1=Digi-Key, Turn-On Delay Time=4.6ns, Width=1.25mm
G1 Logo1: ClassName=PCB_FEATURE

## Via types
v1: diameter 19.68, hole 5.91, 1-SIG-TOP to 4-SIG-BOT, tented both sides, 77 vias
v2: diameter 21.65, hole 7.87, 1-SIG-TOP to 4-SIG-BOT, 32 vias
v3: diameter 23.81, hole 11.81, 1-SIG-TOP to 4-SIG-BOT, tented both sides, 9 vias

## Nets (pads, with @x,y where several pads share a name; then routed paths per layer and width w, separated by ;. In a path a pad name is that pad's centre, name@x,y a point inside that pad or via, vN(x,y) a via of type N, cw(c..) or ccw(c..) an arc to the next point about the centre after c; other vN are vias at no path point)
BLDC_NTC: P17.4 TP7.1 | length 57.7
  4-SIG-BOT w6: TP7.1 665.94,550.94 P17.4
BLDC_U: P17.1 TP1.1 U1.14 U1.15 | length 352.9
  1-SIG-TOP w10: U1.15 669.69,449.68 680,460 689.37,450.63 U1.14
  1-SIG-TOP w20: 680,460 695.79,460 P17.1
  4-SIG-BOT w6: P17.1 843.11,551.89 TP1.1
BLDC_V: P17.2 TP3.1 U1.16 U1.17 | length 335.6
  1-SIG-TOP w10: U1.17 630.31,450.32 640.36,460.36 650,450.71 U1.16
  1-SIG-TOP w20: 640.36,460.36 640.36,463.62 P17.2
  4-SIG-BOT w6: P17.2 784.06,550.94 TP3.1
BLDC_W: P17.3 TP5.1 U1.18 U1.19 | length 328
  1-SIG-TOP w10: U1.19 590.94,450.94 600.67,460.67 ; 600,461.34 600.67,460.67 ; U1.18 610.63,450.71 600.67,460.67
  1-SIG-TOP w20: 600,461.34 600,482.32 P17.3
  4-SIG-BOT w6: TP5.1 P17.3
DIR: U1.11 U2.1 | length 182.2
  1-SIG-TOP w6: U1.11 766.89,369.69 v1(782.2,385) ; v1(780,455) 850.51,455 U2.1
  4-SIG-BOT w6: v1(780,455) 780,387.2 v1(782.2,385)
DIR_IN: P402.4 U2.8 | length 103.5
  1-SIG-TOP w6: U2.8 1001.85,454.53 P402.4
DRV_TP.SCL: R1.1 TP9.1 U1.7 U3.7 | length 346.6
  1-SIG-TOP w6: U1.7 709.06,254.06 705,250 R1.1 709.06,223.74 709.06,224.06 735,250 v1(785,250) 800,250 812.13,237.87 U3.7
  4-SIG-BOT w6: v1(785,250) 806,229 806,126 TP9.1
DRV_TP.SDA: R2.1 TP11.1 U1.8 U3.6 | length 327.4
  1-SIG-TOP w6: U1.8 764.38,310.62 775,300 R2.1 825,280.32 v1(825,265) 825,245.75 827.87,242.87 U3.6
  4-SIG-BOT w6: v1(825,265) 830,260 830,155 860,125 TP11.1
DRV_TP.V1P8: C3.2 U1.4 | length 61.9
  1-SIG-TOP w6: C3.2 625,230 650,255 U1.4
DRV_TP.V3P3: C2.2 C10.2 R1.2 R2.2 R3.1 U1.6 U3.8 | length 174.8
  1-SIG-TOP w6: C2.2 v1(665,235) 689.37,259.37 U1.6 ; v1(705,160) R1.2 ; C10.2 746.97,217.72 v1(770,217.72) U3.8 ; R2.2 v1(865,300) ; R3.1 v1(865,340)
DRV_TP.VREG: C6.1 D1.1 R4.2 TP12.1 U1.3 | length 68.8
  1-SIG-TOP w6: v1(590,225) 605,240 615,240 630.31,255.32 U1.3
  other v1: 480,135 575,135
FG: P401.3 R3.2 U1.9 | length 1369
  1-SIG-TOP w6: v1(340,50) 350,40 703.35,40 727.2,63.84 742.8,63.84 750.49,56.16 756.16,56.16 v1(760,60) ; U1.9 774.69,330.31 v1(780,325) 795,340 R3.2
  4-SIG-BOT w6: P401.3 335.47,441.17 343.84,432.8 343.84,413.84 335.47,405.47 335.47,54.53 v1(340,50) ; v1(760,60) 760,85.35 763.84,89.2 763.84,104.8 755,113.65 755,136.35 763.84,145.2 763.84,160.8 760,164.65 760,165 751.16,173.84 751.16,309.19 766.97,325 v1(780,325)
GND: C2.1 C3.1 C5.2 C6.2 C7.2 C8.1 C9.2 C10.1 D1.2 D2.2 MNT1.1 MNT2.1 MNT3.1 MNT4.1 P17.5 P401.1 P402.5 TP6.1 TP8.1 TP10.1 U1.2 U1.5 U1.12 U1.13 U1.25 U2.9 U3.4 | length 336.2
  1-SIG-TOP w10: U1.2 v3(610.63,310.63) v3(650,350) ; U1.5 669.69,330.32 v3(650,350) ; v3(689.37,389.37) v3(650,350) ; v3(689.37,389.37) U1.25@708.66,389.38 ; U1.13 709.06,389.77 U1.25@708.66,389.38 ; U1.12 U1.25@708.66,389.38
  other v1: 850,44.49 925,44.49 1000,44.49 745,97 745,153 250,194.49 925,194.49 1000,194.49 137.5,269.49 287.5,269.49 362.5,269.49 437.5,269.49 900,275 137.5,419.49 737.5,419.49 1112.5,419.49 100,494.49 175,494.49 250,494.49 400,494.49 550,494.49 925,494.49 137.5,569.49 287.5,569.49 362.5,569.49 512.5,569.49 887.5,569.49 962.5,569.49 1037.5,569.49 1112.5,569.49 250,644.49 475,644.49 550,644.49 625,644.49 700,644.49 850,644.49 925,644.49 212.5,719.49 887.5,719.49 962.5,719.49
  other v2: 118.11,55.12 1062.99,55.12 73.57,73.57 162.65,73.57 1018.45,73.57 1107.53,73.57 55.12,118.11 181.1,118.11 1000,118.11 1125.98,118.11 73.57,162.65 162.65,162.65 1018.45,162.65 1107.53,162.65 118.11,181.1 1062.99,181.1 118.11,606.3 1062.99,606.3 73.57,624.75 162.65,624.75 1018.45,624.75 1107.53,624.75 55.12,669.29 181.1,669.29 1000,669.29 1125.98,669.29 73.57,713.83 162.65,713.83 1018.45,713.83 1107.53,713.83 118.11,732.28 1062.99,732.28
  other v3: 650,310.63 689.37,310.63 610.63,350 689.37,350 610.63,389.37 650,389.37
I2C.SCL: TP13.1 U2.2 U3.2 | length 488.5
  1-SIG-TOP w6: v1(805,435) 805.16,434.84 U2.2 ; U3.2 812.13,142.87 v1(830,125)
  4-SIG-BOT w6: TP13.1 805,455 v1(805,435) 805,413.35 817.2,401.16 817.2,283.84 806.16,272.8 806.16,257.2 818,245.35 818,137 v1(830,125)
I2C.SDA: TP14.1 U2.3 U3.3 | length 405.6
  1-SIG-TOP w6: U3.3 827.87,162.13 838.54,151.46 v1(860.86,151.46) ; v1(830,415) 830.16,415.16 U2.3
  4-SIG-BOT w6: v1(860.86,151.46) 842,170.33 842,255.35 843.84,257.2 843.84,276.16 830,290 v1(830,415) 840,425 TP14.1
NetC1_1: C1.1 U1.23 | length 60.1
  1-SIG-TOP w6: C1.1 502.6,309.68 523.22,330.31 U1.23
NetC1_2: C1.2 U1.24 | length 69.1
  1-SIG-TOP w6: C1.2 500,271.65 538.97,310.62 U1.24
NetC4_1: C4.1 U1.22 | length 51.9
  1-SIG-TOP w6: C4.1 U1.22
NetJ1_2: J1.2 U3.5 | length 23.5
  1-SIG-TOP w6: U3.5 846.34,215 J1.2
NetR4_1: R4.1 U1.1 | length 99.8
  1-SIG-TOP w6: R4.1 542.6,209.06 590.94,257.4 U1.1
SCL_IN: P402.1 U2.7 | length 219
  1-SIG-TOP w6: U2.7 930.16,434.84 962,403 962,349.65 968.84,342.8 968.84,310.37 P402.1
SDA_IN: P402.2 U2.6 | length 180.3
  1-SIG-TOP w6: U2.6 929.84,415.16 950,395 v1(950,335)
  4-SIG-BOT w6: v1(950,335) 981.38,335 991.38,325 P402.2
SPEED: D2.1 P401.4 U1.10 | length 1533.9